# Altium PCB hv_pm.PcbDoc
Units mil, origin at the board's own origin, x right, y up, seen from the top; angles counter-clockwise.
Board outline 1808.9 x 1574.8 mil, 2 copper layers (Top Layer, Bottom Layer); 44 components, 26 nets, 143 pads, 21 vias.
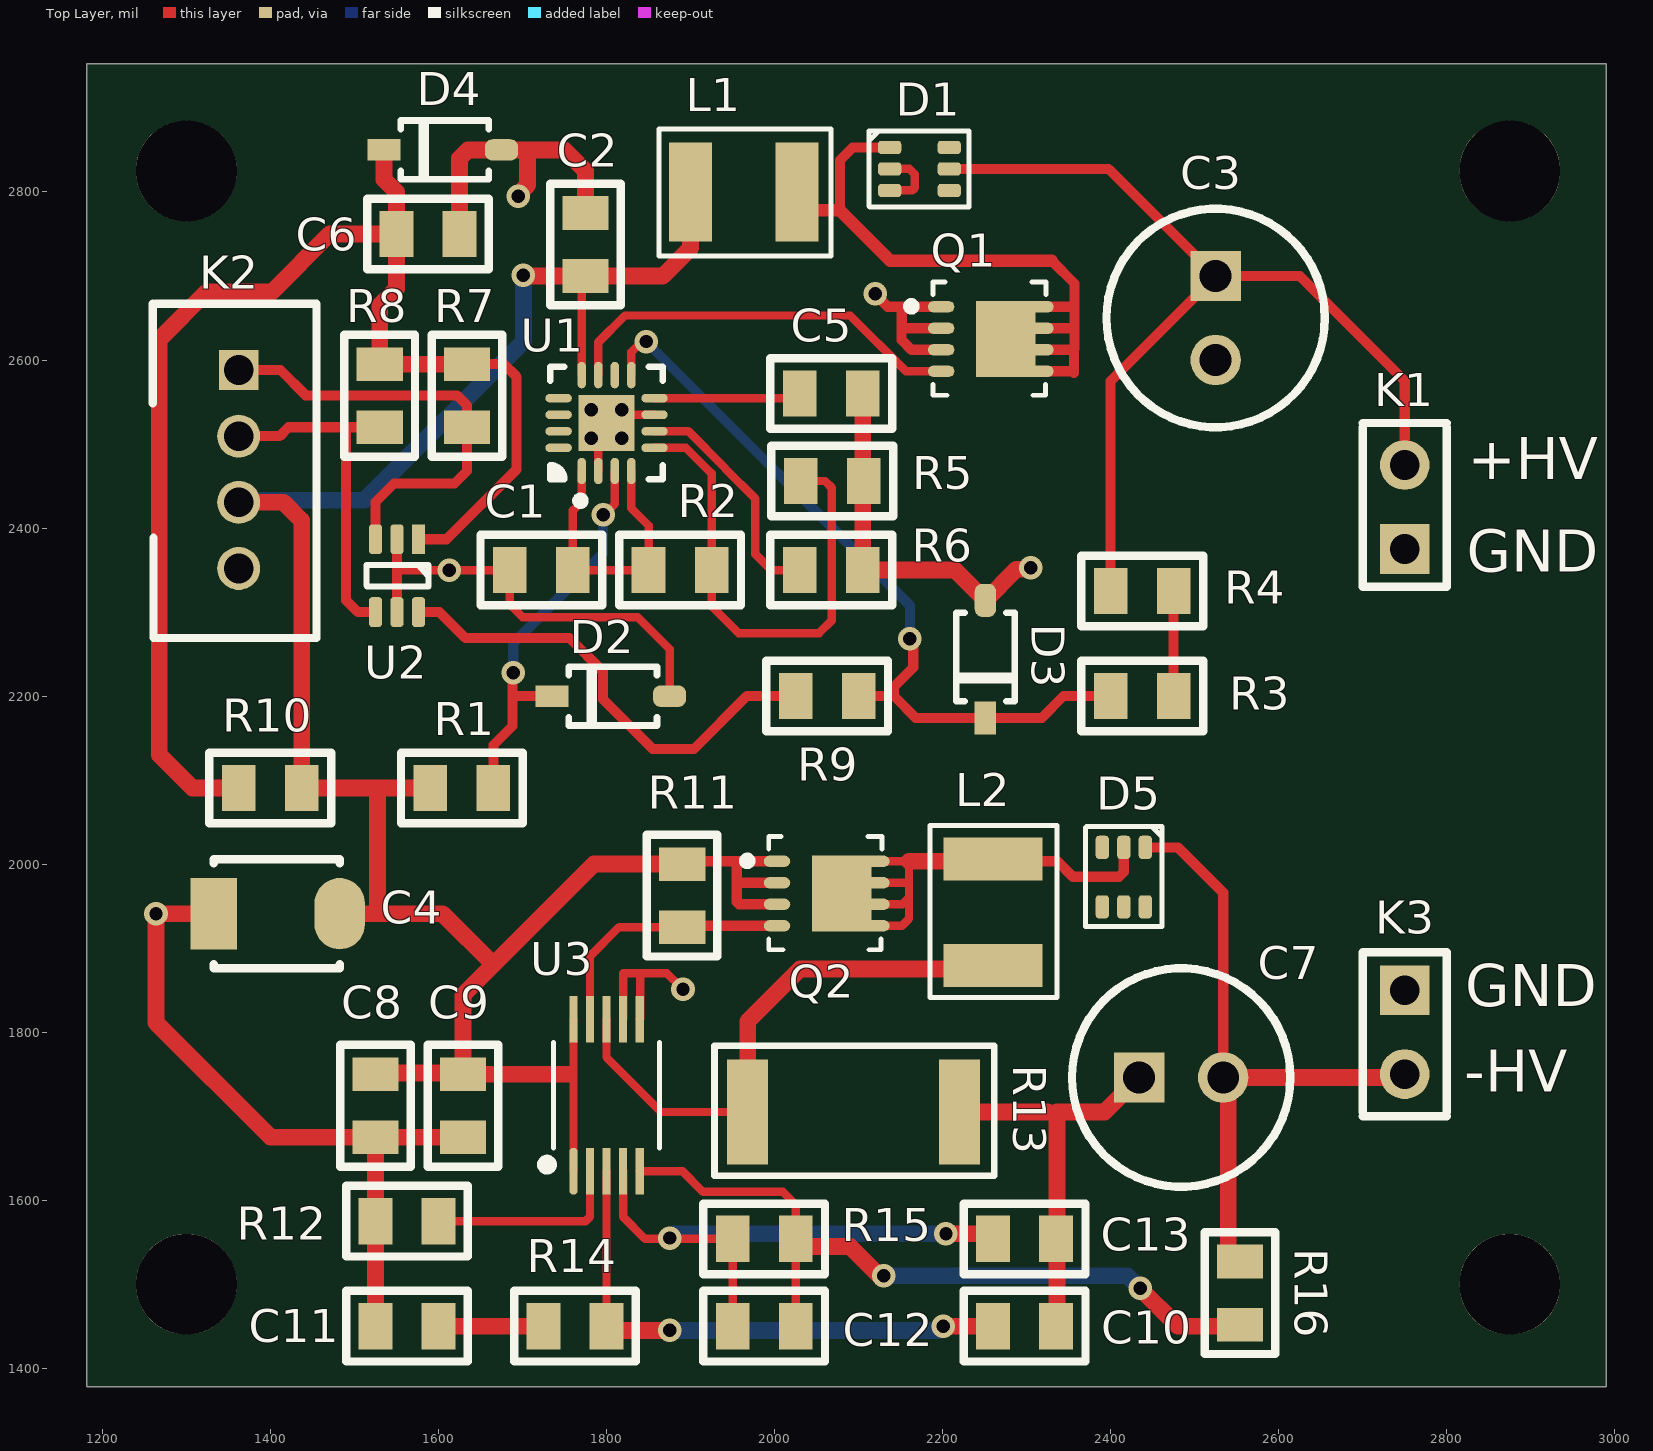
[diagram p0: Top Layer view]
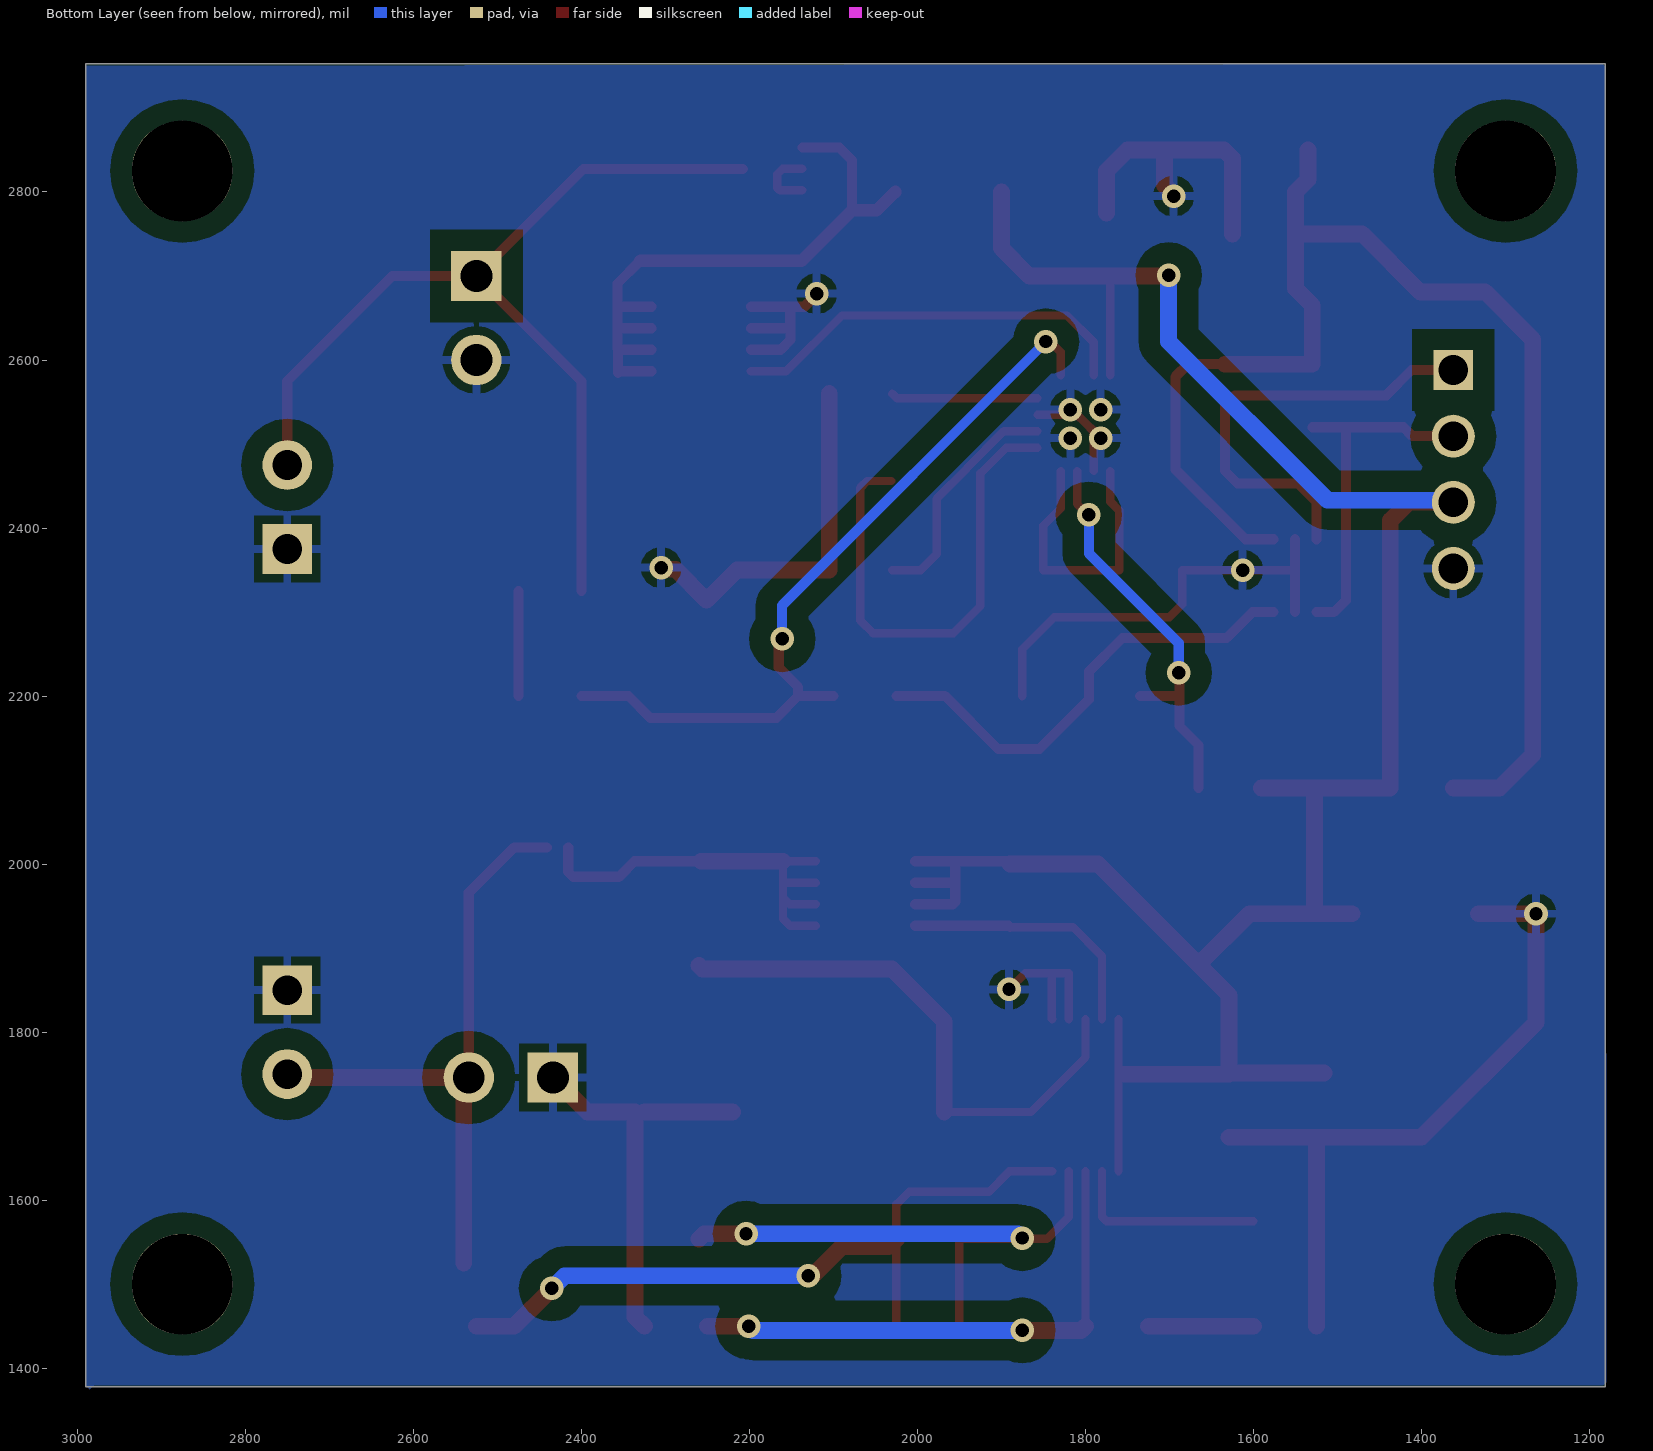
[diagram p1: Bottom Layer view, seen from below]

## Layer stack, top to bottom
Top Solder: solder mask 0.4, Solder Resist, Dk 3.5
Top Layer: signal copper 1.4
Dielectric 1: dielectric 12.6, FR-4, Dk 4.8
Bottom Layer: signal copper 1.4
Bottom Solder: solder mask 0.4, Solder Resist, Dk 3.5

## Board outline
1181.1,1377.95 2990,1377.95 2990,2952.76 1181.1,2952.76

## Design rules (kind name [scope] priority, off if disabled: settings)
Clearance Clearance_poly [InPolygon] p1: gap=25
Clearance Clearance_1 [All] p2: gap=6
HoleSize [All] p1: absolutevalues=TRUE maxlimit=150 minlimit=1 maxpercent=80.000 minpercent=20.000
MinimumSolderMaskSliver [All] p1: minsoldermaskwidth=1
PolygonConnect [All] p1: connectstyle=Relief reliefconductorwidth=10 reliefentries=4 polygonreliefangle="90 Angle" airgapwidth=10
RoutingVias [All] p1: holewidth=28 width=50 viastyle="Through Hole" minholewidth=10 minwidth=20 maxholewidth=30 maxwidth=80
SilkToSilkClearance [All] p1: silktosilkclearance=6
SilkToSolderMaskClearance [IsPad] p1: minsilkscreentomaskgap=4 clearancetoexposedcopper=TRUE
SolderMaskExpansion [All] p1: expansion=4
Width [All] p1: maxlimit=50 minlimit=10 preferedwidth=10
26 further rules are at their usual default settings.

## Components (designator, comment, footprint, x,y, rotation, side; value= is the part's Value field where it differs from the comment)
C1 "cap0805" SM0805 1684.99,2350 r0 top
C2 "cap0805" SM0805 1775,2775 r270 top
C3 "CAP_d6.3x2.5mm" CAP_d6.3x2.5mm 2525,2700 r270 top
C4 "CAP_POL_SMB" CAP_POL_SMB 1472.44,1940.94 r180 top
C5 "cap0805" SM0805 2030,2560 r0 top
C6 "cap0805" SM0805 1625,2750 r180 top
C7 "CAP_d6.3x2.5mm" CAP_d6.3x2.5mm 2433.96,1746.02 r0 top
C8 "cap0805" SM0805 1525,1675 r90 top
C9 "cap0805" SM0805 1629.01,1675 r90 top
C10 "cap0805" SM0805 2335,1450 r180 top
C11 "cap0805" SM0805 1525,1450 r0 top
C12 "cap0805" SM0805 2025,1450 r180 top
C13 "cap0805" SM0805 2335,1554.01 r180 top
D1 "BAV99S" SOT-363 2137,2853 r270 top
D2 "DiodeZener_SOD123" SOD123 1875,2200 r180 top
D3 "DiodeZener_SOD123" SOD123 2251,2314 r270 top
D4 "DiodeZener_SOD123" SOD123 1675,2850 r180 top
D5 "BAV99S" SOT-363 2441.18,2020 r180 top
K1 "1x2PLS" JUMPER2 2750,2375 r180 top
K2 "Grove_4pin, through hole" "Grove 4 pin" 1362.2,2351.89 r180 top
K3 "1x2PLS" JUMPER2 2750,1850 r0 top
L1 "inductance SMT 3.2x4.5 mm" inductor_LQH43PN 2015.78,2800 r270 top
L2 "inductance SMT 3.2x4.5 mm" inductor_LQH43PN 2260,1995 r0 top
Q1 "MOSFET-N_BSZ42DN25NS3" "TSON 3.8x3.8mm -" 2255.31,2625 r0 top
Q2 "Si7113ADN" "TSON 3.8x3.8mm -" 2060,1965 r0 top
R1 "res0805" SM0805 1590.35,2090.55 r0 top
R2 "res0805" SM0805 1850,2350 r0 top
R3 "res0805" SM0805 2475,2200 r180 top
R4 "res0805" SM0805 2400,2325 r0 top
R5 "res0805" SM0805 2106,2455.99 r180 top
R6 "res0805" SM0805 2105,2350 r180 top
R7 "res0805" SM0805 1634.01,2520 r90 top
R8 "res0805" SM0805 1530,2520 r90 top
R9 "res0805" SM0805 2025,2200 r0 top
R10 "res0805" SM0805 1437.2,2090.55 r180 top
R11 "res0805" SM0805 1890,1925 r90 top
R12 "res0805" SM0805 1600,1575 r180 top
R13 "res2512" smt2512 2090,1705 r180 top
R14 "res0805" SM0805 1800,1450 r180 top
R15 "res0805" SM0805 1950,1554.01 r0 top
R16 "res0805" SM0805 2554,1452 r90 top
U1 "boost converter" "QFN-16 3x3mm" 1800,2525 r90 top
U2 "MCP4017" sc70-6 1576.18,2386.61 r180 top
U3 "MAX1846" MSOP-10_M 1800,1725 r0 top

## Footprints (in the part's own frame and the unit in brackets; to place one, negate y for a bottom-side part, rotate by r counter-clockwise, add the part's x,y. Pads: shape width x height; smd on the part's side, far side on the other; paste and mask are expansions set on the pad)
CAP_d6.3x2.5mm [mil]
  rect 60x60 hole 38: 1(0,0)
  round 60 hole 38: 2(100,0)
  silkscreen extent -80,-130 180,130
CAP_POL_SMB [mil]
  oval 60x85 smd: 1(-10,0)
  rect 55x85 smd: 2(140,0)
  silkscreen extent -10,-65 140,65
"Grove 4 pin" [mm] "vertical 4 pin 2mm pitch, through hole"
  rect 1.2x1.2 hole 0.9: 1(0,-6)
  round 1.3 hole 0.9: 2(0,-4) 3(0,-2) 4(0,0)
  silkscreen extent -2.35,-8 2.6,2.1
inductor_LQH43PN [mm] "inductor"
  rect 3x1.3 smd: 1(0,-2.941) 2(0,0.275)
  silkscreen extent -1.91,-3.9 1.93,1.3
JUMPER2 [mm]
  rect 1.5x1.5 hole 0.9: 1(0,0)
  round 1.5 hole 0.9: 2(0,-2.54)
  silkscreen extent -1.27,-3.81 1.27,1.14
MSOP-10_M [mm] "MSOP, 10-Leads, Body 3x3x1.1mm, Pitch 0.5mm, Lead Span 4.9mm, IPC Low Density"
  oct 0.25x1.4 smd paste-0.025 mask+0.075: 1(-1,-2.3)
  rect 0.25x1.4 smd paste-0.025 mask+0.075: 2(-0.5,-2.3) 3(0,-2.3) 4(0.5,-2.3) 5(1,-2.3) 6(1,2.3) 7(0.5,2.3) 8(0,2.3) 9(-0.5,2.3) 10(-1,2.3)
  silkscreen extent -1.95,-2.25 1.6,1.6, body extent -1.5,-1.5 1.5,1.5, height 1.1
"QFN-16 3x3mm" [mm] "QFN, 16-Leads, Body 3.00x3.00mm, Pitch 0.50mm, Thermal Pad 1.70x1.70mm, IPC Medium Density"
  oval 0.8x0.25 smd: 1(-1.45,0.75) 2(-1.45,0.25) 3(-1.45,-0.25) 4(-1.45,-0.75) 9(1.45,-0.75) 10(1.45,-0.25) 11(1.45,0.25) 12(1.45,0.75)
  oval 0.25x0.8 smd: 5(-0.75,-1.45) 6(-0.25,-1.45) 7(0.25,-1.45) 8(0.75,-1.45) 13(0.75,1.45) 14(0.25,1.45) 15(-0.25,1.45) 16(-0.75,1.45)
  rect 1.7x1.7 smd: 17(0,0)
  silkscreen extent -2.47,-1.7 1.7,1.7, body extent -1.55,-1.55 1.55,1.55, height 0.9
sc70-6 [mm]
  rect 0.4x0.9 smd: 1(0,0)
  rrect50% 0.4x0.9 smd: 2(0.65,0) 3(1.3,0) 4(1.3,2.2) 5(0.65,2.2) 6(0,2.2)
  silkscreen extent -0.3,0.77 1.58,1.43
SM0805 [mil]
  rect 40x55 smd: 1(0,0) 2(75,0)
  silkscreen extent -35,-42 110,42
smt2512 [mil]
  rect 49x125 smd: 1(-129.92,0) 2(122.05,0)
  silkscreen extent -171,-79 161,76
SOD123 [mm]
  rrect70% 1x0.65 smd: 1(0,0)
  rect 1x0.65 smd: 2(3.556,0)
  silkscreen extent 0.38,-0.89 3.05,0.89
SOT-363 [mm]
  rrect50% 0.4x0.7 smd: 1(0,0) 2(0.65,0) 3(1.3,0) 4(1.3,1.8) 5(0.65,1.8) 6(0,1.8)
  silkscreen extent -0.5,-0.63 1.8,2.4
"TSON 3.8x3.8mm -" [mm] "TSON, power mosfet"
  oval 0.8x0.34 smd: 1(-1.45,0.975) 2(-1.45,0.325) 3(-1.45,-0.325) 4(-1.45,-0.975) 5(1.55,-0.975) 6(1.55,-0.325) 7(1.55,0.325) 8(1.55,0.975)
  rect 1.8x2.29 smd: 9(0.5,0)
  silkscreen extent -2.47,-1.7 1.72,1.73, body extent -1.55,-1.6 1.55,1.55, height 0.9

## Part data
C1 C2 C5 C6 C8 C9 C10 C11 C12 C13: "Capacitor"
C4: "CAP_POL_SMB(3528)"
D1 D5: "sot343 diodes pack"
D2 D3 D4: "SOD123"
K2: "4 pin vertical 2mm"
L1 L2: library part inductor_LQH43PN
Q1: "N-Channel MOSFET"
Q2: library part MOSFET-P_Si7113ADN, "P-Channel MOSFET"
R1 R2 R3 R4 R5 R6 R7 R8 R9 R10 R11 R12 R13 R14 R15 R16: "Resistor"
U1: library part HV9150, "qfn16"
U2: "I2C 128 tap digital pot"
U3: "non-inverting buffer sot23-5"

## Free pads (board coordinates)
  round 120 hole 120: 2(1300,1500) 2(1300,2825) 2(2875,1500) 2(2875,2825)

## Via types
v1: diameter 28, hole 16, Top Layer to Bottom Layer, 21 vias

## Nets (pads, with @x,y where several pads share a name; then routed paths per layer and width w, separated by ;. In a path a pad name is that pad's centre, name@x,y a point inside that pad or via, vN(x,y) a via of type N, cw(c..) or ccw(c..) an arc to the next point about the centre after c; other vN are vias at no path point)
+5V: C6.2 D4.2 R7.2 R8.2 R10.2 U2.1 | length 1639.8
  Top Layer w12: U2.1 1609.61,2386.61 1693,2470 1693,2580 1678,2595 R7.2
  Top Layer w20: R10.2 1307.09,2090.55 1267.72,2129.92 1267.72,2624.72 1324.1,2681.1 1401.57,2681.1 1470.47,2750 C6.2 ; D4.2 1535,2815 1550,2800 C6.2 ; R7.2 R8.2 1530,2665 1550,2685 C6.2
+VIN: C2.2 C4.1 C8.2 C9.2 K2.3 L1.1 Q2.1 Q2.2 Q2.3 R1.1 R10.1 R11.2 U1.12 U3.1 U3.10 | length 2908.4
  Top Layer w10: U3.1 U3.10 ; U1.12 1770.47,2695.47 C2.2
  Top Layer w12: R11.2 1893.39,2003.39 1955,2003.39 ; Q2.3 1957.79,1952.21 1955,1955 1955,1980 ; Q2.2 1957.2,1977.8 1955,1980 ; Q2.1 1955,2003.39 ; 1955,1980 1955,2003.39
  Top Layer w20: K2.3 1415.83,2430.63 1437.2,2409.25 R10.1 1527.56,2090.55 ; C4.1 1527.56,1940.94 ; C8.2@1515.75,1751.38 C9.2@1629.01,1751.38 ; R1.1 1527.56,2090.55 ; v1@1703,2700 C2.2 1867,2700 1900,2733 L1.1 ; 1755,1750 C9.2 C9.2@1629.01,1751.38 ; R11.2 1785,2000 1665.35,1880.35 ; 1527.56,1940.94 1604.76,1940.94 1665.35,1880.35 ; 1527.56,1940.94 1527.56,2090.55 ; C9.2@1629.01,1751.38 1629.01,1844.01 1665.35,1880.35
  Bottom Layer w20: K2.3 1364.65,2433.07 1512.07,2433.07 1701,2622 v1(1701,2701)
GND: C1.1 C2.1 C3.2 C4.2 C5.2 C6.1 C7.1 C8.1 C9.1 C10.1 C11.1 C13.1 D2.1 D3.1 D4.1 K1.1 K2.4 K3.1 Q1.1 Q1.2 Q1.3 R5.1 R6.1 R12.2 R13.1 U1.2 U1.7 U1.17 U2.2 U2.5 U3.6 U3.7 | length 3186.9
  Top Layer w10: 1550.59,2350 v1(1613,2350) C1.1 1684.99,2309.01 1700,2294 1837,2294 1875,2256 D2.1 ; U1.2 1790.16,2515.16 U1.17 1809.84,2534.84 U1.7 ; U3.7 1820,1815.87 1820,1870 1840,1870 ; U3.6 1840,1816.18 1840,1870 ; v1@1889,1853 1872,1870 1840,1870
  Top Layer w12: U2.5 1550.59,2350 U2.2 ; v1@2120,2678 2134.61,2663.39 2151.39,2663.39 ; 2151.2,2637.8 2151.2,2623.8 2162.79,2612.21 Q1.3 ; Q1.2 2153.2,2637.8 2151.39,2639.61 2151.39,2663.39 ; Q1.1 2151.39,2663.39
  Top Layer w20: C4.2 v1(1263.78,1940.94) 1263.78,1811.22 1400,1675 C8.1 ; C11.1 R12.2 C8.1 ; C6.1 1625,2840 1635,2850 D4.1 1706,2850 ; C9.1 C8.1 ; v1@1695,2797 1706,2808 1706,2850 ; C2.1 1775,2825 1750,2850 1706,2850 ; C5.2 R6.1 2215,2350 D3.1 2288,2351 2303,2351 v1(2305,2353) ; R13.1 2325,1705 ; C10.1@2325,1450 2336,1461 2336,1705 2392.94,1705 C7.1
  other v1: 1891,1851 1782,2507 1818,2507 1782,2541 1818,2541 2120,2679 1695,2795
NetC1_2: C1.2 R2.1 U1.1 U1.4 | length 338.7
  Top Layer w10: U1.1 1770.47,2431.47 1759.99,2420.99 C1.2 R2.1 1850,2403 1829.53,2423.47 U1.4
NetC3_1: C3.1 D1.5 K1.2 R4.1 | length 1173.5
  Top Layer w12: D1.5 2397.59,2827.41 C3.1 ; R4.1 2400,2575 C3.1 ; K1.2 2750,2575 2625,2700 C3.1
NetC5_1: C5.1 U1.8 | length 175.2
  Top Layer w10: U1.8 2024.53,2554.53 C5.1
NetC7_2: C7.2 D5.1 K3.2 R16.2 | length 776.4
  Top Layer w12: D5.1 2480,2020 2533.96,1966.04 C7.2
  Top Layer w20: R16.2@2540,1525 2540,1739.98 C7.2 2746.02,1746.02 K3.2
NetC10_2: C10.2 R14.1 U3.3 | length 633.6
  Top Layer w10: R14.1 U3.3
  Top Layer w20: R14.1 1805,1445 v1@1870,1445 ; v1(2201,1450) C10.2@2250,1450
  Bottom Layer w20: v1(1875,1445) 2196,1445 v1(2201,1450)
NetC11_2: C11.2 R14.2 | length 125
  Top Layer w20: C11.2 R14.2
NetC12_1: C12.1 R15.2 R16.1 U3.5 | length 885.1
  Top Layer w10: U3.5 1890.55,1634.45 1915,1610 2010,1610 2025,1595 R15.2 C12.1
  Top Layer w20: R15.2 2034.01,1545 2090,1545 v1@2125,1510 ; v1(2435,1495) 2480,1450 2525,1450
  Bottom Layer w20: v1(2130,1510) 2420,1510 v1(2435,1495)
NetC12_2: C12.2 C13.2 R15.1 U3.4 | length 688.9
  Top Layer w10: U3.4 1819.68,1580.32 1845.99,1554.01 R15.1 C12.2
  Top Layer w20: v1(2204,1560) 2254.01,1560 C13.2
  Bottom Layer w20: v1(1875,1555) 1880,1560 v1(2204,1560)
NetD1_1: D1.1 L1.2 Q1.5 Q1.6 Q1.7 Q1.8 Q1.9 | length 769.3
  Top Layer w12: 2078,2778 2078,2838 2093,2853 D1.1 ; Q1.5 2354.39,2586.61 2356.21,2584.79 2356.21,2612.21 Q1.6 ; Q1.7 2356.2,2637.8 2357,2637 ; Q1.8 2354.61,2663.39 2357,2661 ; 2330,2718 2357,2691 2357,2661 ; 2357,2613 2357,2637 ; 2357,2637 2357,2661
  Top Layer w15: L1.2 2048.61,2778 2078,2778 2138,2718 2330,2718
NetD1_2: D1.2 D1.3 | length 80
  Top Layer w10: D1.3 2163.82,2801.82 2167,2805 2167,2821 2160.59,2827.41 D1.2
NetD2_2: D2.2 R1.2 U1.3 | length 480.1
  Top Layer w10: v1@1800,2419 1809.84,2428.84 U1.3
  Top Layer w12: R1.2 1665.35,2141.73 1688,2164.38 1688,2200 ; v1@1688,2229 1688,2200 ; D2.2 1688,2200
  Bottom Layer w12: v1(1689,2228) 1689,2263 1796,2370 v1(1796,2416)
NetD3_2: D3.2 R3.2 R9.2 U1.9 | length 928.8
  Top Layer w10: U1.9 1829.53,2609.53 1841,2621 v1@1842,2621
  Top Layer w12: R9.2 2142,2200 ; v1@2165,2269 2165,2234 2142,2211 2142,2200 ; R3.2 2344,2200 2318,2174 D3.2 2168,2174 2142,2200
  Bottom Layer w12: v1(1847,2622) 2161,2308 v1(2161,2268)
NetD5_2: D5.2 L2.2 Q2.5 Q2.6 Q2.7 Q2.8 Q2.9 | length 526.8
  Top Layer w10: Q2.5 2151.61,1926.61 2160,1935 2160,1960 ; Q2.6 2152.21,1952.21 2160,1960 ; Q2.7 2157.8,1977.8 ; Q2.8 2160,2003.39 2160,1980 2157.8,1977.8 ; 2157.8,1977.8 2160,1977.8 2160,1960
  Top Layer w12: L2.2@2257.56,2003.39 2336.61,2003.39 2355,1985 2410,1985 2415.59,1990.59 D5.2
  Top Layer w20: 2160,2003.39 L2.2@2257.56,2003.39
NetL2_1: L2.1 R13.2 U3.8 | length 667.9
  Top Layer w10: U3.8 1800,1770 1865,1705 R13.2
  Top Layer w20: R13.2 1967.95,1812.95 2030,1875 2255.78,1875 L2.1
NetQ1_4: Q1.4 U1.11 | length 487.8
  Top Layer w10: U1.11 1790.16,2621.16 1822,2653 2090,2653 2156.39,2586.61 Q1.4
NetQ2_4: Q2.4 R11.1 U3.9 | length 312.4
  Top Layer w10: U3.9 1780.32,1890.32 1815,1925 R11.1
  Top Layer w12: R11.1 1891.61,1926.61 Q2.4
NetR2_2: R2.2 R5.2 U1.5 | length 599.3
  Top Layer w10: U1.5 1894.53,2495.47 1925,2465 R2.2 1925,2307 1957,2275 2053,2275 2068,2290 2068,2448 2060.01,2455.99 R5.2
NetR3_1: R3.1 R4.2 | length 125
  Top Layer w12: R3.1 R4.2
NetR6_2: R6.2 U1.6 | length 280.4
  Top Layer w10: U1.6 1897.47,2515.16 1941,2471.63 1941,2471 1977,2435 1977,2369 1996,2350 R6.2
NetR9_1: R9.1 U2.6 | length 561.8
  Top Layer w12: U2.6 1601,2300 1632,2269 1756,2269 1796,2229 1796,2196 1855,2137 1904,2137 1967,2200 R9.1
NetR12_1: R12.1 U3.2 | length 236.7
  Top Layer w10: R12.1 1775,1575 1780.32,1580.32 U3.2
SCL: K2.1 R7.1 U2.3 | length 536
  Top Layer w12: K2.1 1411.89,2588.11 1442,2558 1622,2558 1634.01,2545.99 R7.1 1634.01,2468.01 1619,2453 1547,2453 1525,2431 U2.3
SDA: K2.2 R8.1 U2.4 | length 419.7
  Top Layer w12: K2.2 1410.94,2509.37 1421.57,2520 1488.19,2520 ; U2.4 1504,2300 1490,2314 1490,2518.19 1488.19,2520 ; R8.1 1488.19,2520
pads on no net: D1.4 D1.6 D5.3 D5.4 D5.5 D5.6 U1.10 U1.13 U1.14 U1.15 U1.16

## Polygon pours and split planes (outlines as drawn)
GND on Bottom Layer "btl" (solid, pour order 0): 1181.1,2952.76 2990,2950 2990,1380 2985,1375 2980,1380 1180,1380

## Silkscreen, mask and mechanical layers (free items; w line width, h text height)
Top Overlay:
  text "+HV" at 2825,2458 h50
  text "GND" at 2824,2348 h50
  text "GND" at 2822,1831 h50
  text "-HV" at 2821,1729 h50
Mechanical 1:
  lines w10: 1181.1,1377.95 1181.1,2952.76 2993.31,2952.76 2993.31,1377.95 1181.1,1377.95